# Altium PCB PCB1.PcbDoc
Units mil, origin at the board's own origin, x right, y up, seen from the top; angles counter-clockwise.
Board outline 4235 x 3255 mil, 2 copper layers (Top Layer, Bottom Layer); 5 components, 0 nets, 10 pads, 0 vias.
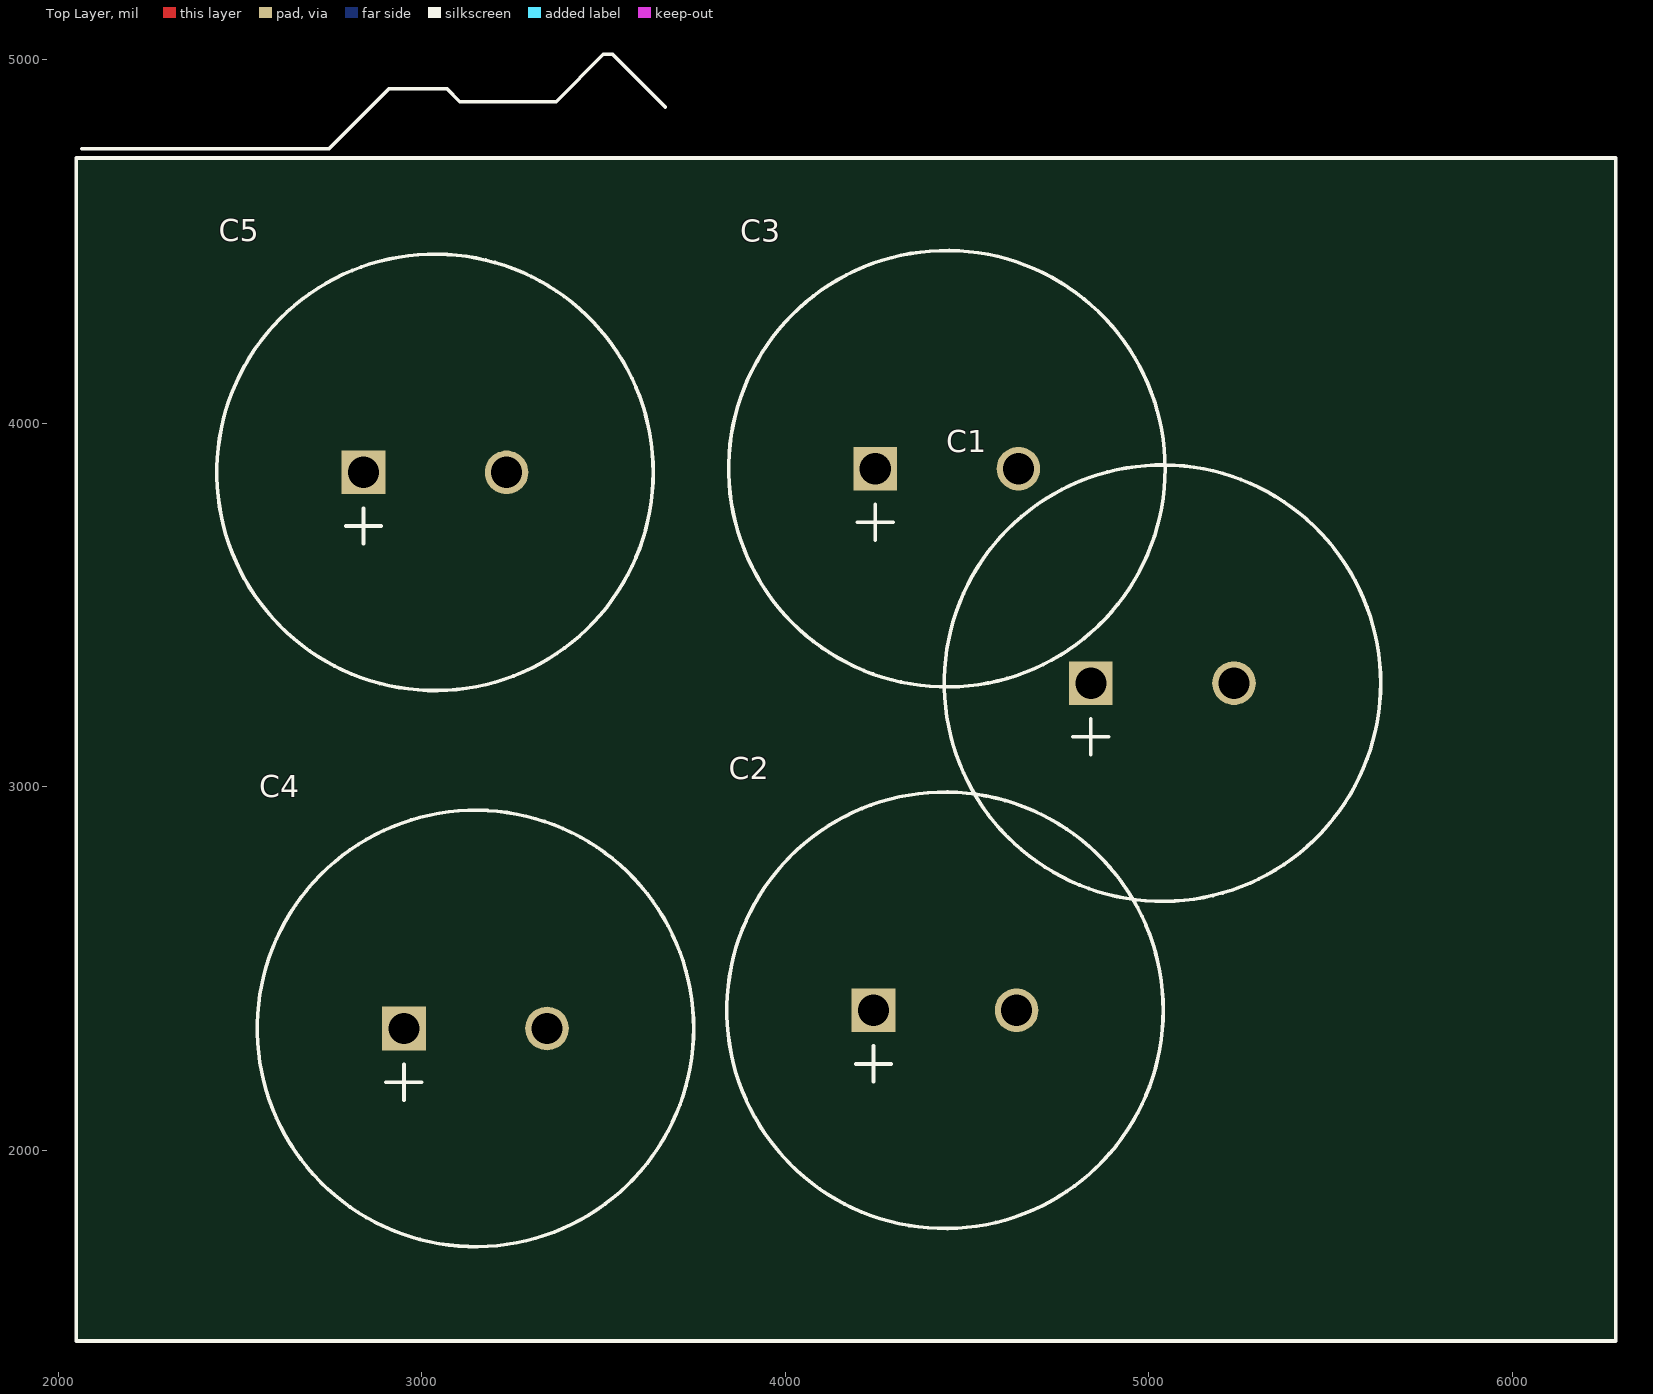
[diagram p0: Top Layer view]
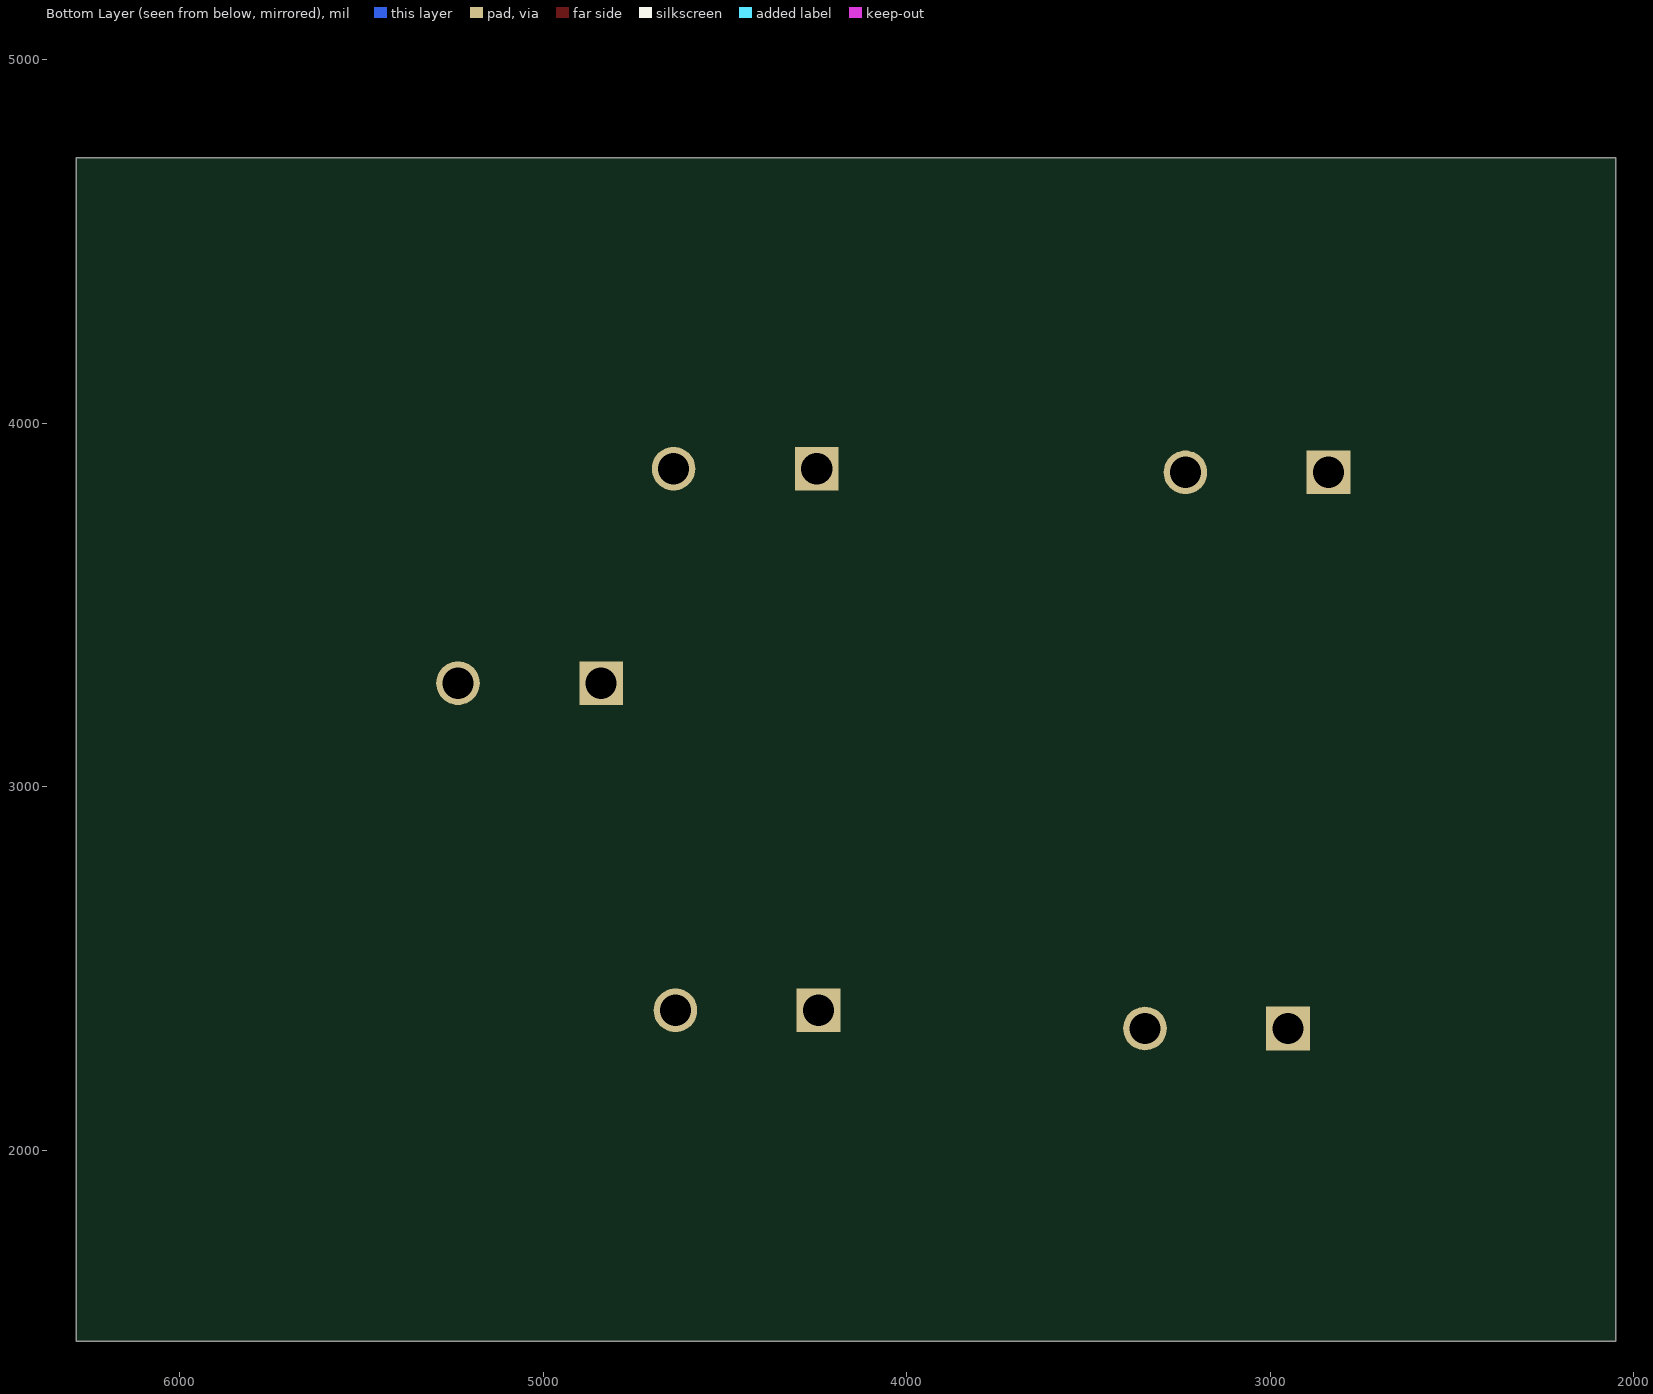
[diagram p1: Bottom Layer view, seen from below]

## Layer stack, top to bottom
Top Solder: solder mask 0.4, Solder Resist, Dk 3.5
Top Layer: signal copper 1.4
Dielectric 1: dielectric 12.6, FR-4, Dk 4.8
Bottom Layer: signal copper 1.4
Bottom Solder: solder mask 0.4, Solder Resist, Dk 3.5

## Board outline
2050,1475 2050,4730 6285,4730 6285,1475

## Design rules (kind name [scope] priority, off if disabled: settings)
Clearance [All] p1: gap=10 ignorepadtopadclearanceinfootprint=FALSE except(0: Arc-Hole Track-Hole SMDPad-Hole THPad-Hole Via-Hole Fill-Hole Poly-Hole Region-Hole Text-Hole)
PolygonConnect [All] p1: connectstyle=Relief reliefconductorwidth=10 reliefentries=4 polygonreliefangle="90 Angle" airgapwidth=10
RoutingVias [All] p1: holewidth=28 width=50 viastyle="Through Hole" minholewidth=28 minwidth=50 maxholewidth=28 maxwidth=50
SolderMaskExpansion [All] p1: expansion=4
Width [All] p1: maxlimit=10 minlimit=10 preferedwidth=10
30 further rules are at their usual default settings.

## Components (designator, comment, footprint, x,y, rotation, side; value= is the part's Value field where it differs from the comment)
C1 "5m6" CAPE10.0MM_Rad_30x45mm 5038.15,3285 r0 top
C2 "5m6" CAPE10.0MM_Rad_30x45mm 4440,2385 r0 top
C3 "5m6" CAPE10.0MM_Rad_30x45mm 4445,3875 r0 top
C4 "5m6" CAPE10.0MM_Rad_30x45mm 3148.15,2335 r0 top
C5 "5m6" CAPE10.0MM_Rad_30x45mm 3036.85,3865 r0 top

## Footprints (in the part's own frame and the unit in brackets; to place one, negate y for a bottom-side part, rotate by r counter-clockwise, add the part's x,y. Pads: shape width x height; smd on the part's side, far side on the other; paste and mask are expansions set on the pad)
CAPE10.0MM_Rad_30x45mm [mil] "10mm Pitch Radial Capacitor"
  rect 120x120 hole 86: 1(-196.85,0)
  round 120 hole 86: 2(196.85,0)
  silkscreen extent -600,-600 600,600, body extent -586,-588 589,588, height 1772

## Part data
C1 C2 C3 C4 C5: library part CAPE_5m6_THT_80V, "Capacitor THT Electrolytic 5600uF 20% 80V", Manufacturer 1="Panasonic - ECG", Manufacturer Part Number 1=ECO-S1KP562DA, Package / Case="30.00mm Dia x 45.00mm H", Ratings=80V, Supplier Part Number 1=P7374-ND, Tolerance=±20%, Material="Aluminum Electrolytic", SCDType=undef, Supplier 1=Digi-Key

## Nets (pads, with @x,y where several pads share a name; then routed paths per layer and width w, separated by ;. In a path a pad name is that pad's centre, name@x,y a point inside that pad or via, vN(x,y) a via of type N, cw(c..) or ccw(c..) an arc to the next point about the centre after c; other vN are vias at no path point)
pads on no net: C1.1 C1.2 C2.1 C2.2 C3.1 C3.2 C4.1 C4.2 C5.1 C5.2

## Silkscreen, mask and mechanical layers (free items; w line width, h text height)
Top Overlay:
  lines w10: 2065,4755 2745,4755 2910,4920 3070,4920 3105,4885 3370,4885 3500,5015 3525,5015 3670,4870 ; 2050,1475 2050,4680 2050,4730 6285,4730 6285,1475 2050,1475